# EAGLE board palette_regulator (EAGLE 8.3.2)
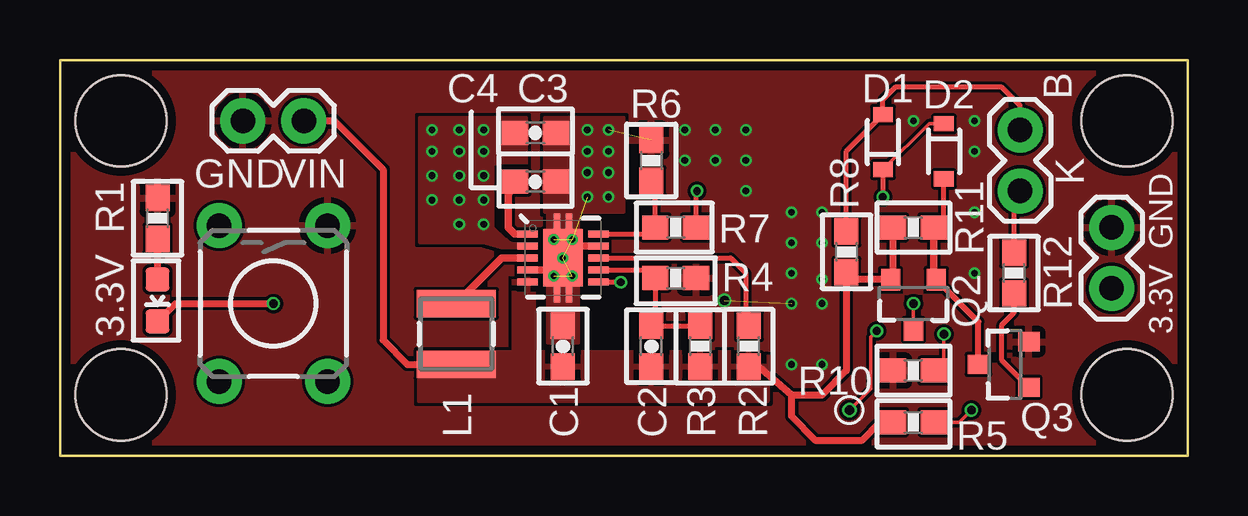
[diagram p0: board, top side]
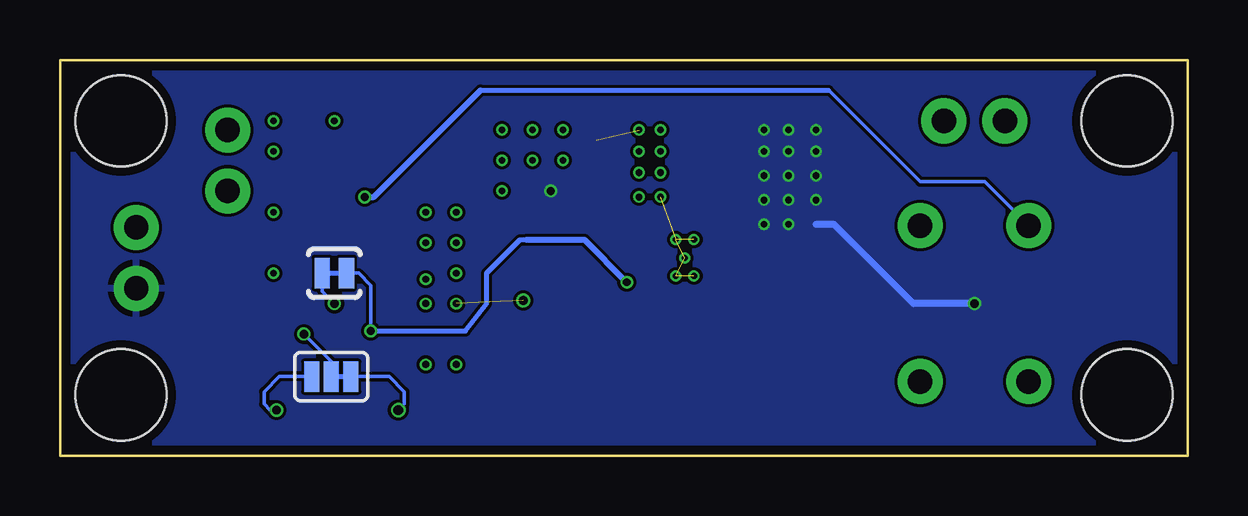
[diagram p1: board, bottom side, seen from below]

Size 46.99 x 16.51 mm. Coordinates in mm from the lower left corner, seen from the top.
Outline: 0,0 46.99,0 46.99,16.51 0,16.51 0,0
Copper layers (1*2*15*16): Top 0.035559375mm / dielectric 0.17018125mm / GND 0.01778125mm / dielectric 47mil / 3V3 0.01778125mm / dielectric 0.17018125mm / Bottom 0.035559375mm
Design rules "OSHPark-4layer *": minimum track width 5mil, minimum drill 10mil, track to track 5mil, track to pad 5mil, pad to pad 5mil, via to via 5mil, smd to smd 5mil, copper to edge 15mil, drill to drill 6mil, minimum pad ring 4mil, minimum via ring 4mil, stop-mask expansion 4mil, vias tented up to drill 12mil, thermal gap 10mil
Net classes: 1 USB: width 0.254 mm, drill 0.33 mm, clearance 0.159 mm; 2 Top GND Pour: clearance 0.762 mm to class 1
Holes 3.8 mm at 2.54,13.97 2.54,2.54 44.45,13.97 44.45,2.54

## Footprints (pad centres in the part's own frame; a part is rotated, then mirrored left to right if it is on the bottom)
0603-CAP = smd 1.1 x 1: 1 -0.85,0; 2 0.85,0
SOD-323 = smd 0.63 x 0.83: A 1.15,0; C -1.15,0
1X02 = drill 1.016 pad 1.88: 1 0,0; 2 2.54,0
LPS3015 = smd 1.14 x 3.3: 1 -1.27,0; 2 1.27,0
LED-0603 = smd 1 x 1: A 0,-0.877; C 0,0.877
SOT23-3 = smd 0.8 x 0.9: 1 -0.95,-1; 2 0.95,-1; 3 0,1.1
0603-RES = smd 1.1 x 1: 1 -0.85,0; 2 0.85,0
TACTILE_SWITCH_PTH_6.0MM = drill 1.016 pad 1.88: 1 -3.251,2.261; 2 3.251,2.261; 3 -3.251,-2.261; 4 3.251,-2.261
PAD-JUMPER-2-NC_BY_TRACE_YES_SILK = smd 0.635 x 1.27: 1 -0.508,0; 2 0.508,0
PAD-JUMPER-3-2OF3_NC_BY_TRACE_YES_SILK_FULL_BOX = smd 0.635 x 1.27: 1 -0.813,0; 2 0,0; 3 0.813,0
PAD-016 = drill 0.406: 1 0,0
QFN-10_PAD = smd 0.297 x 0.85: 1 -1,-1.475; 2 -0.5,-1.475; 3 0,-1.475; 4 0.5,-1.475; 5 1,-1.475; 6 1,1.475; 7 0.5,1.475; 8 0,1.475; 9 -0.5,1.475; 10 -1,1.475 | smd 0.7 x 0.28: 11 -1.5,0.25; 12 -1.5,-0.25; 13 1.5,0.25; 14 1.5,-0.25 | smd 2.4 x 1.65: 15 0,0

## Placement (x,y rotation side)
C1  10uF  [0603-CAP]  20.95,4.57 90 top
C2  0.1uF  [0603-CAP]  24.64,4.57 90 top
C3  22uF  [0603-CAP]  19.81,13.46 0 top
C4  0.1uF  [0603-CAP]  19.81,11.43 0 top
D1  BAT20J  [SOD-323]  34.29,13.08 90 top
D2  BAT20J  [SOD-323]  36.83,12.7 270 top
J1  [1X02]  10.16,13.97 180 top
J2  [1X02]  40.01,13.59 270 top
J3  [1X02]  43.81,6.99 90 top
L1  2.2uH, 2.1A  [LPS3015]  16.51,5.08 270 top
LED2  AMBER/ 592 nm  [LED-0603]  4.06,6.48 180 top
Q2  PCHANNEL  [SOT23-3]  35.56,6.35 180 top
Q3  MMBT2222A  [SOT23-3]  39.37,3.81 90 top
R1  470  [0603-RES]  4.06,9.91 270 top
R2  10K  [0603-RES]  28.7,4.57 90 top
R3  2M  [0603-RES]  26.67,4.57 270 top
R4  220K  [0603-RES]  25.65,7.42 180 top
R5  1K  [0603-RES]  35.56,1.4 180 top
R6  220K  [0603-RES]  24.64,12.32 270 top
R7  1.2M  [0603-RES]  25.65,9.53 0 top
R8  100K  [0603-RES]  32.77,8.51 270 top
R10  1K  [0603-RES]  35.56,3.56 0 top
R11  100K  [0603-RES]  35.56,9.53 180 top
R12  100K  [0603-RES]  39.75,7.62 270 top
S2  [TACTILE_SWITCH_PTH_6.0MM]  8.89,6.35 270 top
SJ6  [PAD-JUMPER-2-NC_BY_TRACE_YES_SILK]  35.56,7.62 0 bottom
SJ7  [PAD-JUMPER-3-2OF3_NC_BY_TRACE_YES_SILK_FULL_BOX]  35.69,3.3 0 bottom
TP_MOSI  MOSI  [PAD-016]  32.89,1.91 90 top
U2  TPS61200  [QFN-10_PAD]  20.95,8.26 270 top

## Library data of the parts
C1 = appfruits; MF: Murata; MPN: GRM188R60J106ME47D
C2 C4 = appfruits; MF: Kemet; MPN: C0603C104J3RACTU
C3 = appfruits; MF: Murata; MPN: GRM188R60J226MEA0D
D1 D2 = appfruits; MF: STMicroelectronics; MPN: BAT20JFILM; PROD_ID: DIO-11623
J1-J3 = SparkFun-Connectors
L1 = appfruits; MF: Coilcraft; MPN: LPS3015-222MRB
LED2 = appfruits; MF: Avago Technologies; MPN: HSMA-C190
Q2 = SparkFun-DiscreteSemi; MF: ON Semiconductor; MPN: BSS84LT1G; PROD_ID: TRANS-08285
Q3 = appfruits; MF: ON Semiconductor; MPN: MMBT2222ALT1G
R1 = appfruits; MF: Panasonic; MPN: ERJ-3GEYJ471V
R2 = appfruits; MF: Panasonic; MPN: ERJ-3GEYJ103V
R3 = appfruits; MF: Panasonic; MPN: ERJ-3GEYJ205V
R4 R6 = appfruits; MF: Panasonic; MPN: ERJ-3GEYJ224V
R5 R10 = appfruits; MF: Panasonic; MPN: ERJ-3GEYJ102V
R7 = appfruits; MF: Panasonic; MPN: ERJ-3GEYJ125V
R8 R11 R12 = appfruits; MF: Panasonic; MPN: ERJ-3EKF1003V
S2 = SparkFun-Switches; MF: C&K Components; MPN: PTS645SH50SMTR 92 LFS; PROD_ID: SWCH-08441; SF_SKU: COM-00097
SJ6 = SparkFun-Passives
SJ7 = appfruits
TP_MOSI = appfruits; LABEL: MOSI
U2 = appfruits; MF: Texas Instruments; MPN: TPS61200DRCR; PROD_ID: IC-10035

## Nets
3.3V: C3.1 J3.1 LED2.C R7.2 U2.2
BUTTON: D1.A J2.1 R8.1
FB: R6.2 R7.1 U2.10
GND [Top GND Pour]: J1.2 J3.2 Q3.2 R1.1 R4.1 R6.1 R10.1 S2.1
KILL: J2.2 R12.1
N$1: R10.2 SJ7.2
N$2: L1.1 U2.3
N$3: D2.A Q2.1 Q3.3 R11.1
N$4: Q3.1 R12.2
N$5: R5.1 SJ7.1
N$6: D1.C D2.C S2.3
N$7: Q2.3 SJ6.1
N$8: LED2.A R1.2
PGND: C1.2 C3.2 C4.2 U2.4 U2.9 U2.11 U2.12 U2.13 U2.14 U2.15
PS: R2.2 U2.8
SOFTPOWER: SJ6.2 SJ7.3 TP_MOSI.1 U2.6
UVLO: C2.2 R3.1 R4.2 U2.7
VAUX: C4.1 U2.1
VCC: C1.1 C2.1 J1.1 L1.2 Q2.2 R2.1 R3.2 R5.2 R8.2 R11.2 U2.5

## Tracks (layer width: path | path; a pad name or v marks a point on that pad's centre or on a via)
3.3V  (via drill 0.28, 0.33, 0.35)
  Top 0.203: R7.2 26.5,11.01 v26.54,11.05
  Top 0.3: LED2.C 4.81,6.35 v8.89,6.35
  Bottom 0.3: 15.49,9.65 14.73,9.65 11.43,6.35 v8.89,6.35
  other vias: 16.64,12.7 16.64,11.68 16.64,10.67 16.64,9.65 16.64,13.59 17.65,13.59 17.65,12.7 17.65,11.68 17.65,10.67 17.65,9.65 15.49,13.59 15.49,12.7 15.49,11.68 15.49,10.67
  pour Top (isolate 0.203, no thermals): 19.68,8.51 19.05,8.51 17.65,8.89 14.99,8.89 14.99,14.1 19.43,14.1 19.43,12.19 18.03,12.19 18.03,9.53 18.54,9.02 19.68,9.02
  pour Bottom: 0,16.51 46.99,16.51 46.99,0 0,0
BUTTON
  Top 0.2: J2.1 40.01,14.61 39.24,15.37 34.8,15.37
  Top 0.203: 34.8,15.37 34.29,14.86 D1.A 32.77,12.71 R8.1
FB
  Top 0.203: U2.10 24.53,9.26 R7.1 24.8,11.3 R6.2
GND  (via drill 0.25, 0.28, 0.38)  (7 unrouted)
  other vias: 27.69,6.48 21.34,7.49 21.34,9.02 20.57,7.49 20.57,9.02 20.95,8.26 21.97,13.59 22.86,12.7 22.86,10.79 21.97,10.79 22.86,11.81 21.97,12.7 22.86,13.59 21.97,11.81 31.75,7.37 26.04,12.32 28.57,13.59 27.3,13.59 26.04,13.59 28.57,11.05 28.57,12.32 27.3,12.32 35.56,13.97 38.1,13.97 38.1,12.7 38.1,10.16 38.1,7.62 30.48,10.16 30.48,6.35 31.75,6.35 30.48,7.62 31.75,3.81 30.48,3.81 30.48,8.89 31.75,10.16 31.75,8.89
  pour Top (isolate 0.254, no thermals): 23.5,14.1 20.32,14.1 20.32,5.71 21.59,5.71 21.59,10.16 23.5,10.16
  pour Top (rank 2): 0,16.51 0,0 46.99,0 46.99,16.51
KILL
  Top 0.2: R12.1 39.75,10.79 J2.2
N$1  (via drill 0.35)
  Top 0.152: v36.83,5.08 36.83,3.98 R10.2
  Bottom 0.152: SJ7.2 35.69,3.94 v36.83,5.08
N$2
  Top 0.305: U2.3 18.41,8.26 L1.1
N$3
  Top 0.203: R11.1 36.83,9.95 D2.A
  Top 0.254: Q3.3 38.27,5.59 Q2.1
  Top 0.305: Q2.1 36.41,7.45 R11.1
N$4
  Top 0.2: Q3.1 39.24,3.99 39.24,5.46 39.75,5.97 R12.2
  Top 0.254: 40.47,2.96 Q3.1
N$5  (via drill 0.35)
  Top 0.152: 36.45,1.44 R5.1 37.47,1.4 v37.97,1.91
  Bottom 0.152: SJ7.1 37.85,3.3 38.48,2.67 38.48,2.16 38.23,1.91 v37.97,1.91
N$6  (via drill 0.33)
  Top 0.152: D2.C 36.21,13.85 D1.C
  Top 0.203: 36.59,13.85 D2.C | D1.C v34.29,10.79
  Bottom 0.152: 14.96,15.24 11.15,11.43 8.46,11.43 S2.3
  Bottom 0.2: 29.46,15.24 14.96,15.24
  Bottom 0.254: v34.29,10.79 33.91,10.79 29.46,15.24
N$7  (via drill 0.35)
  Top 0.152: v35.56,6.35 Q2.3
  Bottom 0.152: SJ6.1 36.07,6.86 v35.56,6.35
N$8
  Top 0.3: LED2.A R1.2
PGND
  Top 0.305: U2.4 20.32,7.75 20.32,7.62 20.95,7.62 U2.15 21.59,8.89 21.73,8.76 U2.9
  pour Top (no thermals): 23.5,14.1 20.19,14.1 20.19,10.16 20.32,10.16 20.32,4.7 21.59,4.7 21.59,10.16 23.5,10.16
PS
  Top 0.203: U2.8 27.94,8.26 28.57,7.62 28.57,6.06
  Top 0.305: 28.57,6.06 R2.2
SOFTPOWER  (via drill 0.33)
  Top 0.152: v34.04,5.21 33.78,4.95 33.78,2.79 TP_MOSI.1
  Top 0.203: U2.6 23.35,7.25
  Top 0.305: 23.35,7.25 v23.37,7.24
  Bottom 0.152: 23.32,7.19 v23.37,7.24 | SJ7.3 33.27,3.3 32.64,2.67 32.64,2.16 TP_MOSI.1 | SJ6.2 34.54,7.62 34.04,7.11 v34.04,5.21
  Bottom 0.2: v34.04,5.21 30.1,5.21 29.21,6.35 29.21,7.62 27.81,9.02 27.56,9.02
  Bottom 0.254: 27.56,9.02 25.15,9.02 v23.37,7.24
UVLO
  Top 0.203: U2.7 24.54,7.75 | R4.2 24.8,6.1 | C2.2 R3.1
  Top 0.305: 24.54,7.75 R4.2 | 24.8,6.1 C2.2
VAUX
  Top 0.305: U2.1 18.94,9.26 18.67,9.53 18.67,10.88 C4.1
VCC
  Top 0.203: Q2.2 34.71,7.45 | R2.1 29.12,3.72 | 33.08,7.35 R8.2
  Top 0.3: 34.71,7.45 R11.2 | 30.48,2.54 29.12,3.72 | 30.48,2.54 31.75,2.54 32.77,3.56 R8.2 | Q2.2 33.08,7.35 | R5.2 34.16,1.4 33.4,0.64 31.5,0.64 30.48,1.65 30.48,2.54 | J1.1 11.43,13.97 13.46,11.94 13.46,4.83 14.48,3.81 L1.2
  pour Top: 29.46,2.29 14.99,2.29 14.99,4.32 18.92,4.32 18.92,7.37 19.71,7.37 19.71,4.32 29.46,4.32

## Text on the board
tPlace: C4 | C3 | D1 | B | R6 | D2 | GND | VIN | K | R8 | R1 | R7 | GND | R11 | R4 | R12 | 3.3V | Q2 | 3.3V | R10 | L1 | C1 | C2 | R3 | R2 | Q3 | R5